# EAGLE board EGB240_npn_transistor_75x50mm (EAGLE 7.5.0)
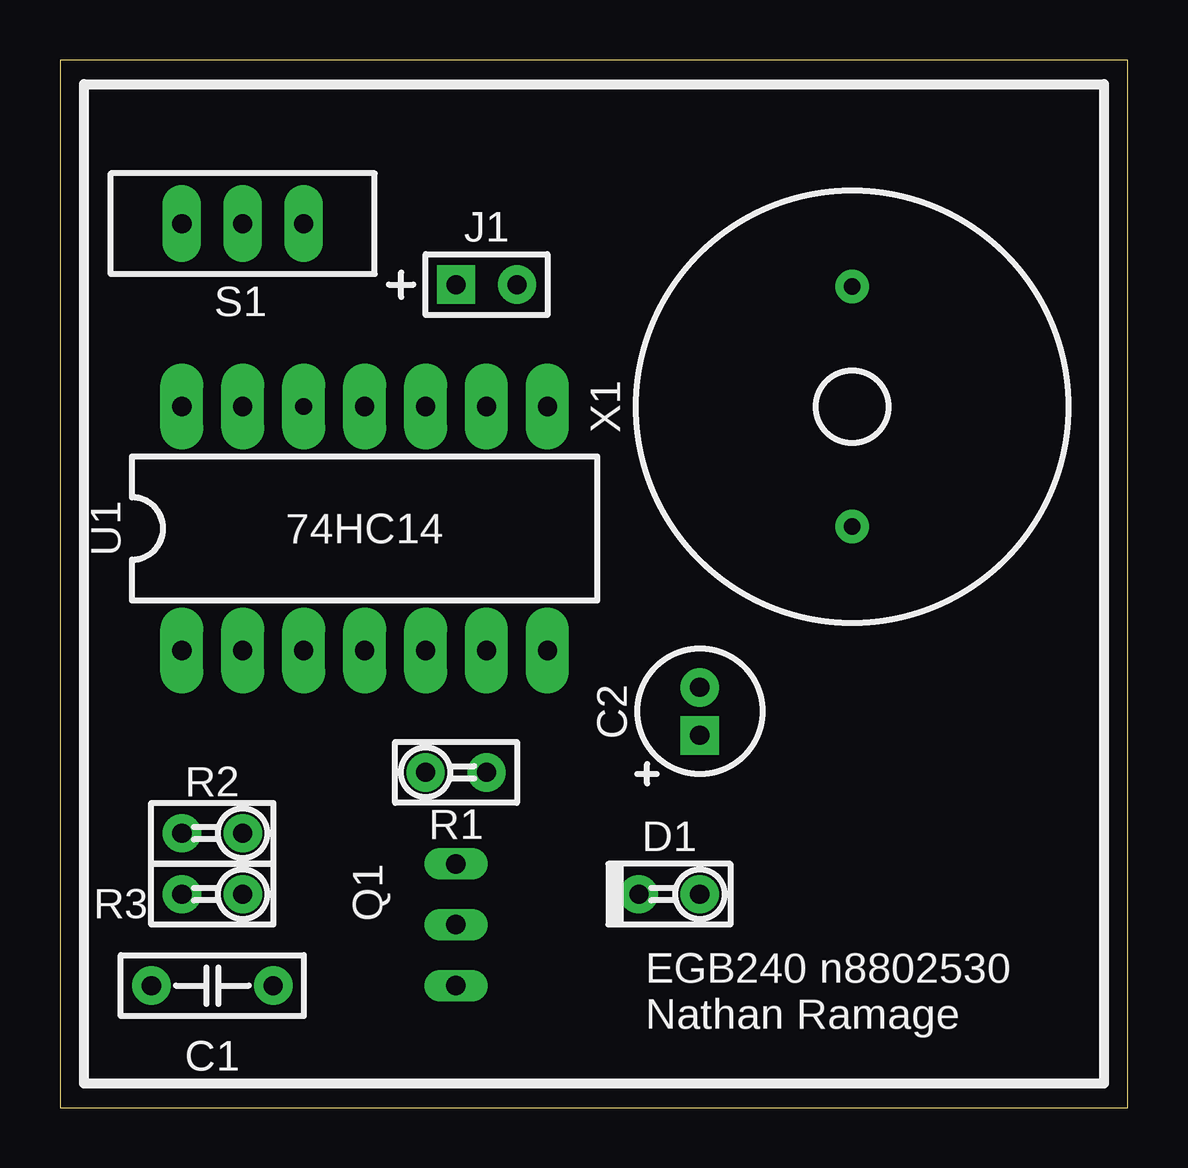
[diagram p0: board, top side]
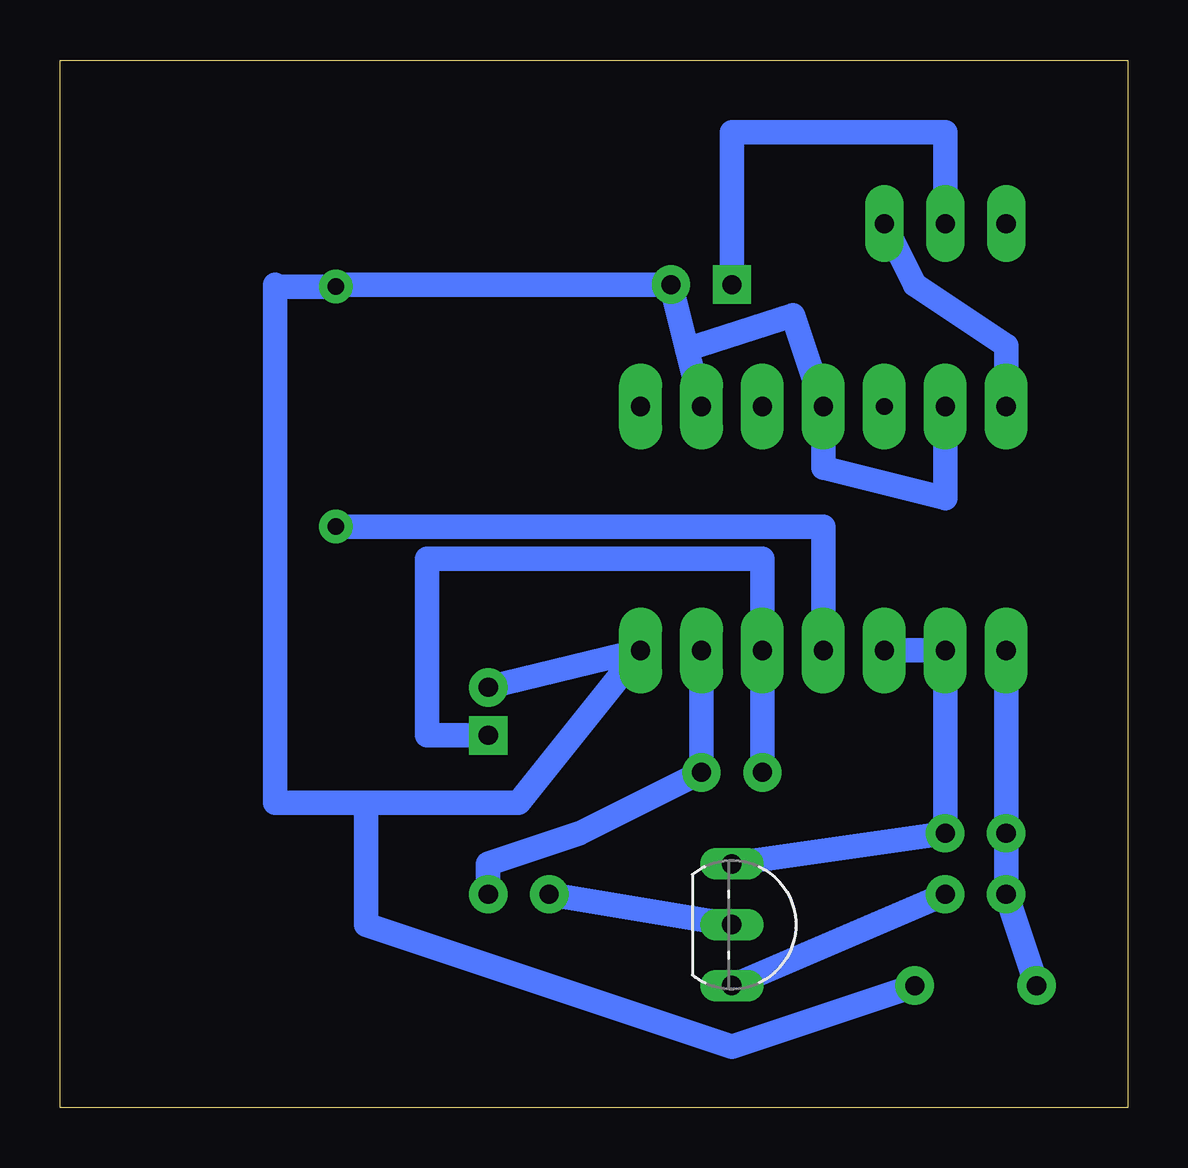
[diagram p1: board, bottom side, seen from below]

Size 44.52 x 43.65 mm. Coordinates in mm from the lower left corner, seen from the top.
Outline: 0,0 44.52,0 44.52,43.65 0,43.65 0,0
Copper layers (1*16): Top 0.035mm / dielectric 1.5mm / Bottom 0.035mm
Design rules "default *": minimum track width 10mil, minimum drill 20mil, track to track 10mil, track to pad 10mil, pad to pad 10mil, via to via 10mil, smd to smd 8mil, copper to edge 1mm, drill to drill 20mil, minimum pad ring 10mil, minimum via ring 8mil, stop-mask expansion 4mil, vias tented up to drill 0mil, thermal gap 10mil
bKeepout: 4 lines

## Footprints (pad centres in the part's own frame; a part is rotated, then mirrored left to right if it is on the bottom)
CAP-DISC-P5.08 = drill 0.8 pad 1.6: P$1 -2.54,0; P$2 2.54,0
CAP-RB-P2.0-D5.0 = drill 0.8 pad 1.6 square: P$1 -1,0 | drill 0.8 pad 1.6: P$2 1,0
DO35-P2.54 = drill 0.8 pad 1.6: A 1.27,0; K -1.27,0
BATT-3V = drill 0.8 pad 1.6 square: P$1 -1.27,0 | drill 0.8 pad 1.6: P$2 1.27,0
TO92-EBC = drill 0.813 long: B 0,-1.27; C -2.54,-1.27; E 2.54,-1.27
AXIAL-P2.54 = drill 0.8 pad 1.6: P$1 -1.27,0; P$2 1.27,0
SS-12 = drill 0.8 pad 1.6 long: 1 0,2.54; 2 0,0; 3 0,-2.54
DIP-14 = drill 0.8 pad 1.8 long: P$1 -5.08,7.62; P$2 -5.08,5.08; P$3 -5.08,2.54; P$4 -5.08,0; P$5 -5.08,-2.54; P$6 -5.08,-5.08; P$7 -5.08,-7.62; P$8 5.08,-7.62; P$9 5.08,-5.08; P$10 5.08,-2.54; P$11 5.08,0; P$13 5.08,5.08; P$14 5.08,7.62 | drill 0.7 pad 1.8 long: P$12 5.08,2.54
PS1720P02 = drill 0.7 pad 1.4: P$1 -5,0; P$2 5,0

## Placement (x,y rotation side)
C1  [CAP-DISC-P5.08]  6.35,5.08 0 top
C2  [CAP-RB-P2.0-D5.0]  26.67,16.51 90 top
D1  [DO35-P2.54]  25.4,8.89 0 top
J1  [BATT-3V]  17.78,34.29 0 top
Q1  PN100  [TO92-EBC]  15.24,7.62 270 bottom
R1  [AXIAL-P2.54]  16.51,13.97 180 top
R2  [AXIAL-P2.54]  6.35,11.43 0 top
R3  [AXIAL-P2.54]  6.35,8.89 0 top
S1  [SS-12]  7.62,36.83 90 top
U1  74HC14  [DIP-14]  12.7,24.13 90 top
X1  [PS1720P02]  33.02,29.21 90 top

## Library data of the parts
C1 C2 D1 J1 R1-R3 S1 U1 X1 = EGB240
Q1 = transistor-npn

## Nets
+3V: S1.3 U1.P$14
GND: C1.P$2 C2.P$2 J1.P$2 U1.P$7 U1.P$9 U1.P$11 U1.P$13 X1.P$2
N$1: C2.P$1 R1.P$2 U1.P$5
N$2: D1.A R1.P$1 U1.P$6
N$3: U1.P$4 X1.P$1
N$4: D1.K Q1.B
N$5: Q1.E R3.P$2
N$6: C1.P$1 R2.P$1 R3.P$1 U1.P$1
N$7: Q1.C R2.P$2 U1.P$2 U1.P$3
N$8: J1.P$1 S1.2

## Tracks (layer width: path | path; a pad name or v marks a point on that pad's centre or on a via)
+3V
  Bottom 1.016: S1.3 8.89,34.29 5.08,31.75 U1.P$14
GND
  Bottom 1.016: C2.P$2 U1.P$7 25.4,12.7 31.75,12.7 | 31.75,12.7 35.56,12.7 35.56,34.21 | C1.P$2 16.51,2.54 31.75,7.62 31.75,12.7 | 35.56,34.21 X1.P$2 33.02,34.29 J1.P$2 18.38,31.6 | 35.56,34.21 35.56,34.29 | U1.P$9 18.38,31.6 | U1.P$13 7.62,25.4 12.7,26.67 U1.P$11 13.97,33.02 18.38,31.6
N$1
  Bottom 1.016: R1.P$2 U1.P$5 15.24,22.86 29.21,22.86 29.21,15.51 C2.P$1
N$2
  Bottom 1.016: U1.P$6 R1.P$1 22.86,11.43 26.67,10.16 D1.A
N$3
  Bottom 1.016: X1.P$1 12.7,24.21 U1.P$4
N$4
  Bottom 1.016: Q1.B D1.K
N$5
  Bottom 1.016: Q1.E R3.P$2
N$6
  Bottom 1.016: U1.P$1 R2.P$1 R3.P$1 C1.P$1
N$7
  Bottom 1.016: Q1.C R2.P$2 U1.P$2 U1.P$3
N$8
  Bottom 1.016: S1.2 7.62,40.64 16.51,40.64 J1.P$1

## Text on the board
tPlace: EGB240 n8802530 / Nathan Ramage